# Altium PCB PCB3 (Failed design).PcbDoc
Units mm, origin at the board's own origin, x right, y up, seen from the top; angles counter-clockwise.
Board outline 152.4 x 101.6 mm, 2 copper layers (Top Layer, Bottom Layer); 9 components, 6 nets, 22 pads, 6 vias.
Unrouted connection lines stored in the file: 10.
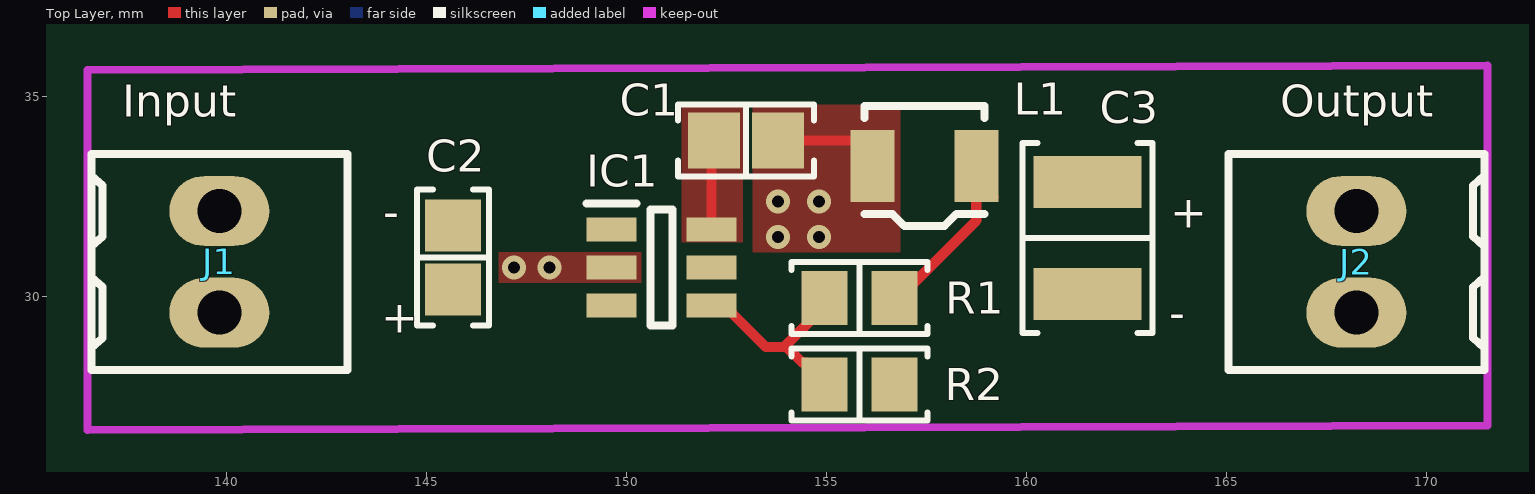
[diagram p0: Top Layer view]
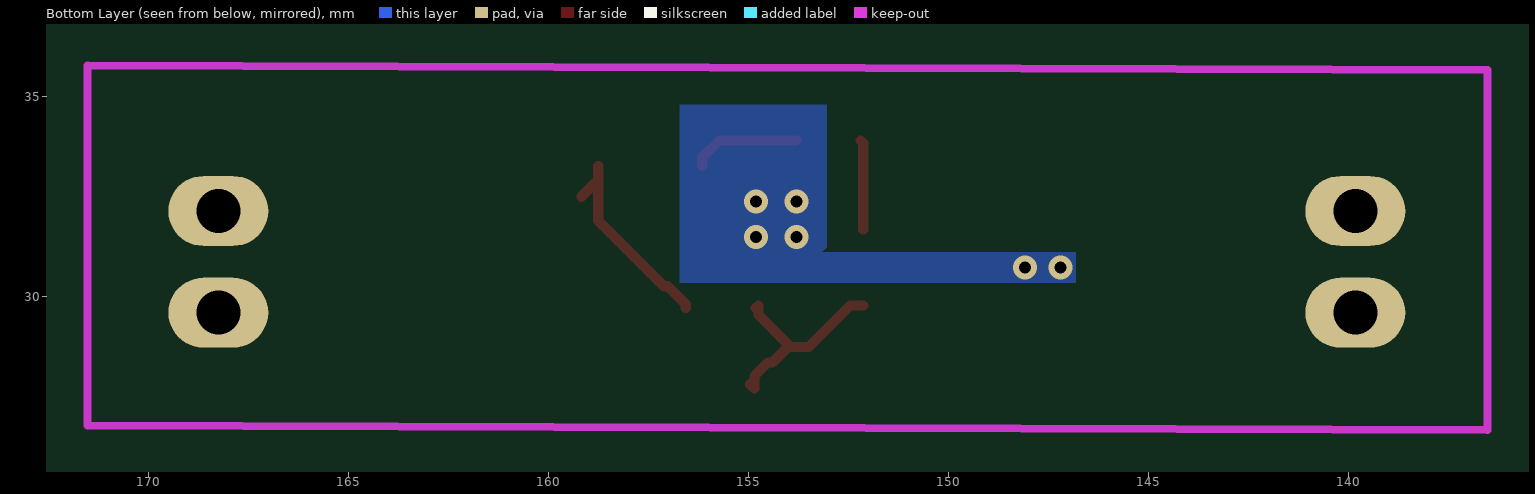
[diagram p1: Bottom Layer view, seen from below]

## Layer stack, top to bottom
Top Solder: solder mask 0.0102, Solder Resist, Dk 3.5
Top Layer: signal copper 0.0356
Dielectric 1: dielectric 0.32, FR-4, Dk 4.8
Bottom Layer: signal copper 0.0356
Bottom Solder: solder mask 0.0102, Solder Resist, Dk 3.5

## Board outline
25.4,25.4 177.8,25.4 177.8,127 25.4,127

## Design rules (kind name [scope] priority, off if disabled: settings)
Clearance [All] p1: gap=0.16 ignorepadtopadclearanceinfootprint=FALSE
HoleToHoleClearance [All] p1: gap=0.16 allowstackedmicrovias=TRUE
MinimumSolderMaskSliver [All] p1: minsoldermaskwidth=0.16
PolygonConnect [All] p1: connectstyle=Direct reliefconductorwidth=0.254 reliefentries=4 polygonreliefangle="90 Angle" airgapwidth=0.254
RoutingVias [All] p1: holewidth=0.3 width=0.6 viastyle="Through Hole" minholewidth=0.3 minwidth=0.6 maxholewidth=0.3 maxwidth=0.6
SilkToSilkClearance [All] p1: silktosilkclearance=0.16
SolderMaskExpansion [All] p1: expansion=0.102 istentingtop=FALSE
Width [All] p1: maxlimit=0.8 minlimit=0.16 preferedwidth=0.2
27 further rules are at their usual default settings.

## Components (designator, comment, footprint, x,y, rotation, side; value= is the part's Value field where it differs from the comment)
C1 "0.1µF" "CAP 0805_2012" 152.997,33.909 r0 top
C2 "22µF" "CAP 0805_2012" 145.669,30.988 r270 top
C3 "47µF" "CAP 1210_3225 - 2.8MM" 161.525,31.475 r90 top
IC1 "TPS561208DDCR" SOT95P280X110-6N 150.876,30.734 r0 top
J1 "=PartNumber" "TE 282834-2" 139.825,30.875 r90 top
J2 "=PartNumber" "TE 282834-2" 168.25,30.875 r270 top
L1 "4.7µH" "TDK SPM3012-LR" 157.45,33.274 r0 top
R1 "56.2 kOhms" "RES 0805_2012" 155.829,29.972 r0 top
R2 "10 kOhms" "RES 0805_2012" 155.829,27.813 r180 top

## Footprints (in the part's own frame and the unit in brackets; to place one, negate y for a bottom-side part, rotate by r counter-clockwise, add the part's x,y. Pads: shape width x height; smd on the part's side, far side on the other; paste and mask are expansions set on the pad)
"CAP 0805_2012" [mm] "Chip Capacitor, 2-Leads, Body 2.00x1.20mm, IPC Medium Density"
  rect 1.3x1.4 smd: 1(-0.8,0) 2(0.8,0)
  silkscreen extent -1.7,-0.9 1.7,0.9, body extent -1,-0.64 1,0.64, height 1.26
"CAP 1210_3225 - 2.8MM" [mm] "Chip Capacitor, 2-Leads, Body 3.20x2.50mm, IPC Medium Density"
  rect 1.3x2.7 smd: 1(-1.4,0) 2(1.4,0)
  silkscreen extent -2.37,-1.63 2.37,1.63, body extent -1.6,-1.25 1.6,1.25, height 2.8
"RES 0805_2012" [mm] "Chip Resistor, 2-Leads, Body 2.00x1.25mm, IPC Medium Density"
  rect 1.15x1.35 smd: 1(-0.875,0) 2(0.875,0)
  silkscreen extent -1.7,-0.9 1.7,0.9, body extent -0.95,-0.62 1.05,0.63, height 0.6
SOT95P280X110-6N [mm]
  rect 1.25x0.6 smd: 1(-1.25,0.95) 2(-1.25,0) 3(-1.25,-0.95) 4(1.25,-0.95) 5(1.25,0) 6(1.25,0.95)
  silkscreen extent -1.88,-1.45 0.28,1.6, body extent -1.4,-1.45 1.4,1.45, height 1.1
"TDK SPM3012-LR" [mm] "Inductor, 2-Leads, Body 3.00x3.00mm, IPC Medium Density"
  rect 1.1x1.8 smd: 1(-1.3,0) 2(1.3,0)
  silkscreen extent -1.5,-1.5 1.5,1.5, body extent -1.6,-1.5 1.6,1.5, height 1.2
"TE 282834-2" [mm]
  oval 1.75x2.5 hole 1.1: 1(-1.27,0) 2(1.27,0)
  silkscreen extent -2.7,-3.2 2.7,3.2, body extent -2.77,-3.25 2.77,3.25, height 10

## Part data
C1: library part CC0805MRX7R9BB104, "CAP CER 0.1UF 50V X7R 0805", Device Package="0805 (2012 Metric)", Manufacturer=Yageo, Operating Temperature="-55°C ~ 125°C", Supplier Part Number 1=311-4351-1-ND, Temperature Coefficient=X7R, Tolerance=±20%, Voltage - Rated=50V, Applications="General Purpose", Capacitance=0.1µF, ComponentLink1Description=Datasheet, ComponentLink1URL=https://www.yageo.com/upload/media/product/productsearch/datasheet/mlcc/UPY-GPHC_X7R_6.3V-to-50V_18.pdf, ComponentLink2Description="DigiKey Link", ComponentLink2URL=http://digikey.com/product-detail/en/yageo/CC0805MRX7R9BB104/311-4351-1-ND/8025440, LastUpdated="1/21/2020 12:03:06 AM", Lifecycle Status=Active, Minimum Order=1, Mounting Type="Surface Mount, MLCC", Package / Case="0805 (2012 Metric)", Packaging=TapeAndReel, Part Number=CC0805MRX7R9BB104, Part Status=Active, PartId=2475, Price=0.02, Series=CC, Size / Dimension="0.079\" L x 0.049\" W (2.00mm x 1.25mm)", Supplier 1=DigiKey, Thickness (Max)="0.037\" (0.95mm)"
C2: library part CL21A226KOQNNNG, "CAP CER 22UF 16V X5R 0805", Device Package="0805 (2012 Metric)", Manufacturer="Samsung Electro-Mechanics", Operating Temperature="-55°C ~ 85°C", Supplier Part Number 1=1276-7092-1-ND, Temperature Coefficient=X5R, Tolerance=±10%, Voltage - Rated=16V, Applications="General Purpose", Capacitance=22µF, ComponentLink1Description=Datasheet, ComponentLink1URL=//media.digikey.com/pdf/Data%20Sheets/Samsung%20PDFs/CL21A226KOQNNNG_Spec.pdf, ComponentLink2Description="DigiKey Link", ComponentLink2URL=http://digikey.com/product-detail/en/samsung-electro-mechanics/CL21A226KOQNNNG/1276-7092-1-ND/8021509, LastUpdated="1/21/2020 12:03:05 AM", Lifecycle Status=Active, Minimum Order=1, Mounting Type="Surface Mount, MLCC", Package / Case="0805 (2012 Metric)", Packaging=TapeAndReel, Part Number=CL21A226KOQNNNG, Part Status=Active, PartId=3000, Price=0.09, Series=CL, Size / Dimension="0.079\" L x 0.049\" W (2.00mm x 1.25mm)", Supplier 1=DigiKey, Thickness (Max)="0.055\" (1.40mm)"
C3: library part GRM32EC81C476KE15L, "CAP CER 47UF 16V X6S 1210", Device Package="1210 (3225 Metric)", Manufacturer="Murata Electronics", Operating Temperature="-55°C ~ 105°C", Supplier Part Number 1=490-10531-1-ND, Temperature Coefficient=X6S, Tolerance=±10%, Voltage - Rated=16V, Applications="General Purpose", Capacitance=47µF, ComponentLink1Description=Datasheet, ComponentLink1URL=https://search.murata.co.jp/Ceramy/image/img/A01X/G101/ENG/GRM32EC81C476KE15-01.pdf, ComponentLink2Description="DigiKey Link", ComponentLink2URL=http://digikey.com/product-detail/en/murata-electronics/GRM32EC81C476KE15L/490-10531-1-ND/5026469, LastUpdated="1/21/2020 12:30:50 AM", Lifecycle Status=Active, Minimum Order=1, Mounting Type="Surface Mount, MLCC", Package / Case="1210 (3225 Metric)", Packaging=TapeAndReel, Part Number=GRM32EC81C476KE15L, Part Status=Active, PartId=23627, Price=0.23, Series=GRM, Size / Dimension="0.126\" L x 0.098\" W (3.20mm x 2.50mm)", Supplier 1=DigiKey, Thickness (Max)="0.106\" (2.70mm)"
IC1: "Buck Switching Regulator IC Positive Adjustable 0.76V 1 Output 1A SOT-23-6 Thin, TSOT-23-6"
J1 J2: library part 282834-2, "TERM BLK 2P SIDE ENT 2.54MM PCB", Color=Green, Current=10A, Manufacturer="TE Connectivity AMP Connectors", Supplier Part Number 1=A98333-ND, Voltage=150V, ComponentLink1Description=Datasheet, ComponentLink1URL=https://www.te.com/commerce/DocumentDelivery/DDEController?Action=srchrtrv&DocNm=282834&DocType=Customer+Drawing&DocLang=English, ComponentLink2Description="DigiKey Link", ComponentLink2URL=http://digikey.com/product-detail/en/te-connectivity-amp-connectors/282834-2/A98333-ND/1150135, LastUpdated="1/15/2020 4:15:38 AM", Lifecycle Status=Active, Mating Orientation="Horizontal with Board", Minimum Order=1, Mounting Type="Through Hole", Number of Levels=1, Packaging=Bulk, Part Number=282834-2, Part Status=Active, Pitch="0.100\" (2.54mm)", Positions Per Level=2, Price=0.88, Series=Buchanan, Supplier 1=DigiKey, Wire Gauge="16-30 AWG", Wire Termination="Screw - Rising Cage Clamp"
L1: library part SPM3015T-4R7M-LR, "FIXED IND 4.7UH 1.8A 199.1 MOHM", Current - Saturation=3A, Current Rating (Amps)=1.8A, DC Resistance (DCR)="199.1mOhm Max", Device Package=Nonstandard, Inductance Frequency - Test=100kHz, Manufacturer="TDK Corporation", Operating Temperature="-40°C ~ 125°C", Supplier Part Number 1=445-174451-1-ND, Tolerance=±20%, ComponentLink1Description=Datasheet, ComponentLink1URL=https://product.tdk.com/info/en/catalog/datasheets/inductor_commercial_power_spm3015-lr_en.pdf?ref_disty=digikey, ComponentLink2Description="DigiKey Link", ComponentLink2URL=http://digikey.com/product-detail/en/tdk-corporation/SPM3015T-4R7M-LR/445-174451-1-ND/5962377, Height - Seated (Max)="0.047\" (1.20mm)", Inductance=4.7µH, LastUpdated="1/21/2020 3:26:10 AM", Lifecycle Status=Active, Material - Core=Metal, Minimum Order=1, Mounting Type="Surface Mount", Package / Case=Nonstandard, Packaging=TapeAndReel, Part Number=SPM3015T-4R7M-LR, Part Status=Active, PartId=139, Price=0.59, Series=SPM-LR, Shielding=Shielded, Size / Dimension="0.126\" L x 0.118\" W (3.20mm x 3.00mm)", Supplier 1=DigiKey, Type=Wirewound
R1: library part 7-2176093-1, "RES SMD 56.2K OHM 0.1% 1/4W 0805", Device Package="0805 (2012 Metric)", Manufacturer="TE Connectivity Passive Product", Operating Temperature="-55°C ~ 155°C", Power (Watts)="0.25W, 1/4W", Supplier Device Package=0805, Supplier Part Number 1=A110711CT-ND, Temperature Coefficient=±25ppm/°C, Tolerance=±0.1%, ComponentLink1Description=Datasheet, ComponentLink1URL=https://www.te.com/commerce/DocumentDelivery/DDEController?Action=srchrtrv&DocNm=1773272&DocType=DS&DocLang=English, ComponentLink2Description="DigiKey Link", ComponentLink2URL=http://digikey.com/product-detail/en/te-connectivity-passive-product/7-2176093-1/A110711CT-ND/4035066, Composition="Thin Film", Height - Seated (Max)="0.026\" (0.65mm)", LastUpdated="1/21/2020 1:40:37 AM", Lifecycle Status=Active, Minimum Order=1, Number of Terminations=2, Package / Case="0805 (2012 Metric)", Packaging=TapeAndReel, Part Number=7-2176093-1, Part Status=Active, PartId=47633, Price=0.15, Resistance="56.2 kOhms", Series="RP73P, Holsworthy", Size / Dimension="0.079\" L x 0.049\" W (2.00mm x 1.25mm)", Supplier 1=DigiKey
R2: library part AT0805FRE0710KL, "RES SMD 10K OHM 1% 1/8W 0805", Device Package="0805 (2012 Metric)", Manufacturer=Yageo, Operating Temperature="-55°C ~ 155°C", Power (Watts)="0.125W, 1/8W", Ratings=AEC-Q200, Supplier Device Package=0805, Supplier Part Number 1=YAG2132CT-ND, Temperature Coefficient=±50ppm/°C, Tolerance=±1%, ComponentLink1Description=Datasheet, ComponentLink1URL=http://www.yageo.com/documents/recent/PYu-AT_51_RoHS_L_5.pdf, ComponentLink2Description="DigiKey Link", ComponentLink2URL=http://digikey.com/product-detail/en/yageo/AT0805FRE0710KL/YAG2132CT-ND/5139580, Composition="Thin Film", Features="Anti-Sulfur, Automotive AEC-Q200, Moisture Resistant", Height - Seated (Max)="0.024\" (0.60mm)", LastUpdated="1/21/2020 1:49:26 AM", Lifecycle Status=Active, Minimum Order=1, Number of Terminations=2, Package / Case="0805 (2012 Metric)", Packaging=TapeAndReel, Part Number=AT0805FRE0710KL, Part Status=Active, PartId=29266, Price=0.10, Resistance="10 kOhms", Series=AT, Size / Dimension="0.079\" L x 0.049\" W (2.00mm x 1.25mm)", Supplier 1=DigiKey

## Via types
v1: diameter 0.6, hole 0.3, Top Layer to Bottom Layer, 6 vias

## Nets (pads, with @x,y where several pads share a name; then routed paths per layer and width w, separated by ;. In a path a pad name is that pad's centre, name@x,y a point inside that pad or via, vN(x,y) a via of type N, cw(c..) or ccw(c..) an arc to the next point about the centre after c; other vN are vias at no path point)
FB: IC1.4 R1.1 R2.2 | length 5.4
  Top Layer w0.254: IC1.4 152.451,29.784 153.494,28.741 153.936,28.741 ; R1.1@154.813,29.718 154.747,29.784 154.747,29.552 153.936,28.741 ; R2.2 154.848,27.707 154.848,28.019 154.506,28.361 154.392,28.361 154.012,28.741 153.936,28.741
GND: C2.1 C3.1 IC1.1 J1.2 J2.2 R2.1
IN: C2.2 IC1.3 IC1.5 J1.1
NetC1_1: C1.1 IC1.6 | length 2.3
  Top Layer w0.254: IC1.6 152.126,33.838 C1.1
OUT: C3.2 J2.1 L1.2 R1.2 | length 5.1
  Top Layer w0.254: R1.2@156.563,29.718 156.563,29.818 157.011,30.266 157.111,30.266 158.75,31.905 L1.2@158.75,32.924 ; L1.2 L1.2@158.75,32.924 ; L1.2@159.173,32.501 L1.2@158.75,32.924
SW: C1.2 IC1.2 L1.1 | length 2.7
  Top Layer w0.254: C1.2 155.727,33.909 156.15,33.486 L1.1
  other v1: 147.193,30.734 148.082,30.734 153.797,31.496 154.813,31.496 153.797,32.385 154.813,32.385

## Polygon pours and split planes (outlines as drawn)
SW on Top Layer "SW_L01_P002" (solid, pour order 2): 153.162,34.798 153.162,31.115 156.845,31.115 156.845,34.798
NetC1_1 on Top Layer "NETC1_1_L01_P001" (solid, pour order 1): 151.384,31.369 151.384,34.798 152.908,34.798 152.908,31.369
SW on Top Layer "SW_L01_P000" (solid, pour order 0): 150.368,31.115 150.368,30.353 146.812,30.353 146.812,31.115
SW on Bottom Layer "SW_L02_P003" (solid, pour order 3): 146.812,31.115 146.812,30.353 156.718,30.353 156.718,34.798 153.035,34.798 153.035,31.242 153.162,31.115

## Keep-outs
Keep-Out Layer:
  lines w0.2: 136.525,26.67 136.525,35.67 171.525,35.787 171.525,26.787 136.525,26.67

## Silkscreen, mask and mechanical layers (free items; w line width, h text height)
Top Overlay:
  text "Input" at 137.4,34.5 h0.8
  text "Output" at 166.35,34.5 h0.8
  text "-" at 143.925,31.725 h0.8
  text "+" at 163.6,31.725 h0.8
  text "-" at 163.575,29.2 h0.8
  text "+" at 143.875,29.1 h0.8